# Allegro board GPS-NEO-M9N_25x25_V1_00.brd
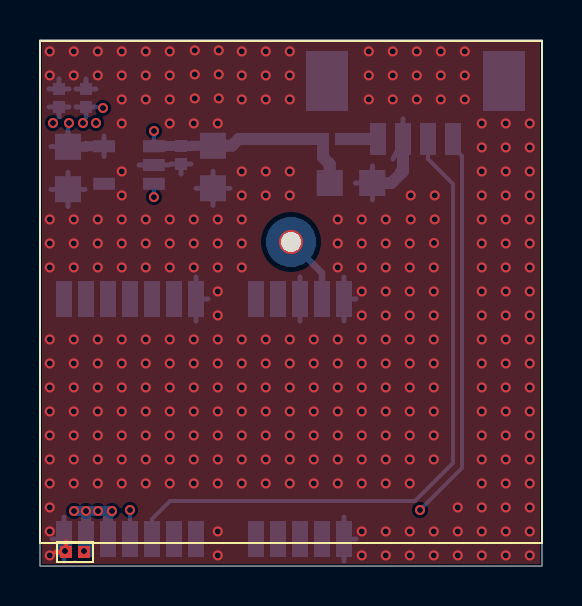
[diagram p0: board, top side]
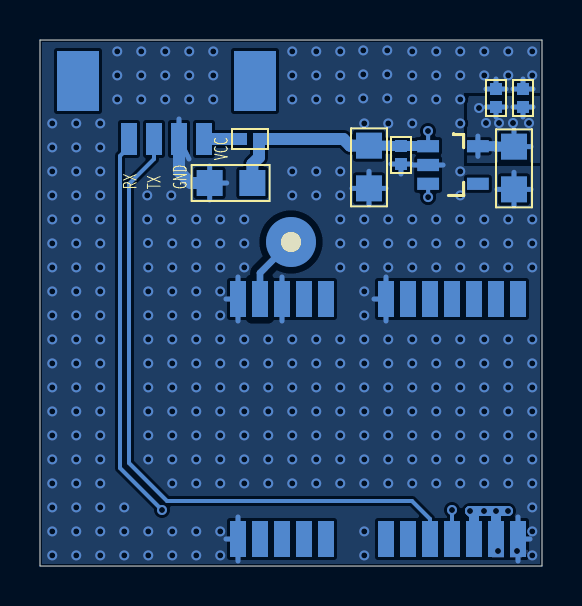
[diagram p1: board, bottom side, seen from below]

Outline 25.1 x 26.3 mm; copper layers: TOP, INNER_LAYER_2, INNER_LAYER_3, BOTTOM. Coordinates in mm from the lower left corner of the outline.
Outline path: 0,26.3 0,0 25.1,0 25.1,26.3 0,26.3

## Design rules (mm)
constraint set DEFAULT: min track width 0.15

## Placement (name value [footprint] x y rotation side)
C1  100uF/6V3  [R_0805]  8.65 19.95 90 bottom
C2  100nF  [R_0402]  7.05 20.55 90 bottom
C3  100uF/6V3  [R_0805]  1.4 19.9 90 bottom
C4  1uF  [R_0402]  1.75 0.7 0 top
C5  100nF  [R_0402]  0.95 23.4 270 bottom
C6  180pF  [R_0805]  15.55 19.15 180 bottom
C7  100nF  [R_0402]  2.3 23.4 270 bottom
J1  4x1_1.25mm Molex Picoblade  [R_CONN_MOLEX53261-4P-1_25H]  20.65 21.35 180 bottom
L1  6.8nH  [R_0402]  14.6 21.35 0 bottom
U1  UBLOX NEO-M9N  [R_UBLOX_NEO]  8.2 7.35 90 bottom
U2  APARM2504 25x25x4mm RHCP  [L_GPS_APARM2504_25X25X4]  12.55 13.7 180 top
U3  LDLN025M33R  [R_SOT23-5PIN]  4.45 20.05 270 bottom

## Library data of the parts
C1 C3 C6 = Cap 0402_2
C2 C4 C5 C7 = Cap 0402_0
J1 = CON3_30: room: COMPORT
L1 = FERRITE_chip_0: room: ATMEL
U1 = RJ11_32
U2 = RJ11_33
U3 = MIC4680_4: room: P25

## Footprints (pads in the part's own frame, mm; a bottom-side part is the same pattern mirrored in y, then rotated)
L_GPS_APARM2504_25X25X4
  round 1.2 hole 1: 1(0,-2.5)
R_0402
  rect 0.6x0.6 smd: 1(-0.45,0) 2(0.45,0)
R_0805
  rect 1.3x1.3 smd: 1(-1.067,0) 2(1.067,0)
R_CONN_MOLEX53261-4P-1_25H
  rect 0.8x1.6 smd: 1(0,0) 2(1.25,0) 3(2.5,0) 4(3.75,0)
  rect 2.1x3 smd: 5(-2.55,2.9) 6(6.3,2.9)
R_SOT23-5PIN
  rect 0.61x1.092 smd: 1(-0.94,-1.245) 2(0,-1.245) 3(0.94,-1.245) 4(0.94,1.245) 5(-0.94,1.245)
R_UBLOX_NEO
  rect 1.8x0.8 smd: 1(6,-7) 2(6,-5.9) 3(6,-4.8) 4(6,-3.7) 5(6,-2.6) 6(6,-1.5) 7(6,-0.4) 8(6,2.6) 9(6,3.7) 10(6,4.8) 11(6,5.9) 12(6,7) 13(-6,7) 14(-6,5.9) 15(-6,4.8) 16(-6,3.7) 17(-6,2.6) 18(-6,-0.4) 19(-6,-1.5) 20(-6,-2.6) 21(-6,-3.7) 22(-6,-4.8) 23(-6,-5.9) 24(-6,-7)

## Nets
+3.3V: C3.2 C4.2 C5.2 C7.2 U1.22 U1.23 U3.5(VOUT)
GND: C1.1 C2.1 C3.1 C4.1 C5.1 C6.1 C7.1 J1.3 U1.7(V_USB) U1.10 U1.12 U1.13 U1.24 U3.2
N17225410: U1.11 U2.1(ANT)
N17225550: J1.1 U1.21
N17225560: J1.2 U1.20
N17225572: C1.2 C2.2 C6.2 L1.1 U3.1 U3.3
N17229201: J1.4 L1.2

Pads without a net: J1 5 6; U1 1 2 3 4 5 6 8 9 14 15 16 17 18 19; U3 4

## Via types
v1: diameter 0.5, hole 0.3, TOP to BOTTOM, 317 vias

## Routing (per net, layer and track width the routed paths; a pad name or vN(x,y) marks a point on that pad's centre or on a via; arc(x,y) is an arc through that point)
+3.3V: length 12.3
  BOTTOM w0.25: C5.2 1.45,22.95 ; C5.2 0.95,22.45 ; C5.2 0.45,22.95 ; 1.8,22.95 C7.2 ; C7.2 2.3,22.45 ; C7.2 2.8,22.95 ; 3.21,21.5 U3.5 3.21,20.48 ; 1.4,21.82 C3.2 0.55,20.97
  BOTTOM w0.5: v1(2.3,2.75) v1(1.7,2.75) ; v1(2.3,2.75) v1(2.9,2.75) v1(3.6,2.75) 3.4,2.55 U1.22 ; v1(2.3,2.75) U1.23 ; C3.2 2.3,20.97 2.32,20.99 U3.5
  vias: v1(0.65,22.15) v1(1.45,22.15) v1(2.15,22.15) v1(2.2,0.75) v1(2.8,22.15) v1(3.15,22.9)
GND: length 35.4
  TOP w0.25: 1.3,1.2 C4.1 0.8,0.7
  TOP w0.3: v1(1.25,0.75) C4.1
  BOTTOM w0.25: C6.1 16.62,20 ; C6.1 15.77,19.15 ; C6.1 16.62,18.3 ; 6.55,20.1 C2.1 ; C2.1 7.05,19.6 ; C2.1 7.55,20.1 ; C1.1 8.65,19.73 ; C1.1 9.5,18.88 ; C1.1 8.65,18.03 ; C1.1 7.8,18.88 ; 0.6,1.35 U1.24 ; U1.24 1.2,2.45 ; U1.24 1.2,0.25 ; 18.15,22.35 J1.3 17.65,20.35 ; C5.1 1.45,23.85 ; C5.1 0.45,23.85 ; C5.1 0.95,24.35 ; 1.4,17.98 C3.1 ; C3.1 2.25,18.83 ; C3.1 0.55,18.83 ; C3.1 1.4,19.68 ; U1.13 15.8,1.35 ; U1.13 15.2,2.45 ; U1.13 15.2,0.25 ; C7.1 2.3,24.35 ; C7.1 2.8,23.85 ; C7.1 1.8,23.85 ; 6.44,20.05 U3.2 4.95,20.05 ; 7.8,12.25 U1.7 ; U1.7 8.4,13.35 ; U1.7 7.8,14.45 ; U1.12 15.8,13.35 ; U1.12 15.2,12.25 ; U1.12 15.2,14.45 ; 13,14.45 U1.10 13,12.25
  BOTTOM w0.6: C6.1 17.57,19.15 18.05,19.63 ; 18.05,19.63 18.15,19.73 J1.3 ; 18.05,19.63 18.05,19.7
  vias: v1(0.49,25.73) v1(0.49,24.53) v1(0.49,17.33) v1(0.49,16.13) v1(0.49,14.93) v1(0.49,11.33) v1(0.49,10.13) v1(0.49,8.93) v1(0.49,7.73) v1(0.49,6.53) v1(0.49,5.33) v1(0.49,4.13) v1(0.49,2.93) v1(0.49,1.73) v1(0.49,0.53) v1(1.69,25.73) v1(1.69,24.53) v1(1.69,17.33) v1(1.69,16.13) v1(1.69,14.93) v1(1.69,11.33) v1(1.69,10.13) v1(1.69,8.93) v1(1.69,7.73) v1(1.69,6.53) v1(1.69,5.33) v1(1.69,4.13) v1(2.89,25.73) v1(2.89,24.53) v1(2.89,17.33) v1(2.89,16.13) v1(2.89,14.93) v1(2.89,11.33) v1(2.89,10.13) v1(2.89,8.93) v1(2.89,7.73) v1(2.89,6.53) v1(2.89,5.33) v1(2.89,4.13) v1(4.09,25.73) v1(4.09,24.53) v1(4.09,23.33) v1(4.09,22.13) v1(4.09,19.73) v1(4.09,18.53) v1(4.09,17.33) v1(4.09,16.13) v1(4.09,14.93) v1(4.09,11.33) v1(4.09,10.13) v1(4.09,8.93) v1(4.09,7.73) v1(4.09,6.53) v1(4.09,5.33) v1(4.09,4.13) v1(5.29,25.73) v1(5.29,24.53) v1(5.29,23.33) v1(5.29,17.33) v1(5.29,16.13) v1(5.29,14.93) v1(5.29,11.33) v1(5.29,10.13) v1(5.29,8.93) v1(5.29,7.73) v1(5.29,6.53) v1(5.29,5.33) v1(5.29,4.13) v1(6.49,25.73) v1(6.49,24.53) v1(6.49,23.33) v1(6.49,22.13) v1(6.49,17.33) v1(6.49,16.13) v1(6.49,14.93) v1(6.49,11.33) v1(6.49,10.13) v1(6.49,8.93) v1(6.49,7.73) v1(6.49,6.53) v1(6.49,5.33) v1(6.49,4.13) v1(7.74,25.78) v1(7.74,24.58) v1(7.74,23.38) v1(7.69,22.13) v1(7.69,17.33) v1(7.69,16.13) v1(7.69,14.93) v1(7.69,11.33) v1(7.69,10.13) v1(7.69,8.93) v1(7.69,7.73) v1(7.69,6.53) v1(7.69,5.33) v1(7.69,4.13) v1(8.94,25.78) v1(8.94,24.58) v1(8.94,23.38) v1(8.89,22.13) v1(8.89,17.33) v1(8.89,16.13) v1(8.89,14.93) v1(8.89,13.73) v1(8.89,12.53) v1(8.89,11.33) v1(8.89,10.13) v1(8.89,8.93) v1(8.89,7.73) v1(8.89,6.53) v1(8.89,5.33) v1(8.89,4.13) v1(8.89,1.73) v1(8.89,0.53) v1(10.09,25.73) v1(10.09,24.53) v1(10.09,23.33) v1(10.09,19.73) v1(10.09,18.53) v1(10.09,17.33) v1(10.09,16.13) v1(10.09,14.93) v1(10.09,11.33) v1(10.09,10.13) v1(10.09,8.93) v1(10.09,7.73) v1(10.09,6.53) v1(10.09,5.33) v1(10.09,4.13) v1(11.29,25.73) v1(11.29,24.53) v1(11.29,23.33) v1(11.29,19.73) v1(11.29,18.53) v1(11.29,11.33) v1(11.29,10.13) v1(11.29,8.93) v1(11.29,7.73) v1(11.29,6.53) v1(11.29,5.33) v1(11.29,4.13) v1(12.49,25.73) v1(12.49,24.53) v1(12.49,23.33) v1(12.49,19.73) v1(12.49,18.53) v1(12.49,11.33) v1(12.49,10.13) v1(12.49,8.93) v1(12.49,7.73) v1(12.49,6.53) v1(12.49,5.33) v1(12.49,4.13) v1(13.69,11.33) v1(13.69,10.13) v1(13.69,8.93) v1(13.69,7.73) v1(13.69,6.53) v1(13.69,5.33) v1(13.69,4.13) v1(14.89,17.33) v1(14.89,16.13) v1(14.89,14.93) v1(14.89,11.33) v1(14.89,10.13) v1(14.89,8.93) v1(14.89,7.73) v1(14.89,6.53) v1(14.89,5.33) v1(14.89,4.13) v1(16.09,17.33) v1(16.09,16.13) v1(16.09,14.93) v1(16.09,13.73) v1(16.09,12.53) v1(16.09,11.33) v1(16.09,10.13) v1(16.09,8.93) v1(16.09,7.73) v1(16.09,6.53) v1(16.09,5.33) v1(16.09,4.13) v1(16.09,1.73) v1(16.09,0.53) v1(16.44,25.73) v1(16.44,24.53) v1(16.44,23.33) v1(17.29,17.33) v1(17.29,16.13) v1(17.29,14.93) v1(17.29,13.73) v1(17.29,12.53) v1(17.29,11.33) v1(17.29,10.13) v1(17.29,8.93) v1(17.29,7.73) v1(17.29,6.53) v1(17.29,5.33) v1(17.29,4.13) v1(17.29,1.73) v1(17.29,0.53) v1(17.64,25.73) v1(17.64,24.53) v1(17.64,23.33) v1(18.54,18.53) v1(18.54,17.33) v1(18.49,16.13) v1(18.49,14.93) v1(18.49,13.73) v1(18.49,12.53) v1(18.49,11.33) v1(18.49,10.13) v1(18.49,8.93) v1(18.49,7.73) v1(18.49,6.53) v1(18.49,5.33) v1(18.49,4.13) v1(18.49,1.73) v1(18.49,0.53) v1(18.84,25.73) v1(18.84,24.53) v1(18.84,23.33) v1(19.74,18.53) v1(19.74,17.33) v1(19.7,16.15) v1(19.69,14.93) v1(19.69,13.73) v1(19.69,12.53) v1(19.69,11.33) v1(19.69,10.13) v1(19.69,8.93) v1(19.69,7.73) v1(19.69,6.53) v1(19.69,5.33) v1(19.69,1.73) v1(19.69,0.53) v1(20.04,25.73) v1(20.04,24.53) v1(20.04,23.33) v1(20.89,2.93) v1(20.89,1.73) v1(20.89,0.53) v1(21.24,25.73) v1(21.24,24.53) v1(21.24,23.33) v1(22.09,22.13) v1(22.09,20.93) v1(22.09,19.73) v1(22.09,18.53) v1(22.09,17.33) v1(22.09,16.13) v1(22.09,14.93) v1(22.09,13.73) v1(22.09,12.53) v1(22.09,11.33) v1(22.09,10.13) v1(22.09,8.93) v1(22.09,7.73) v1(22.09,6.53) v1(22.09,5.33) v1(22.09,4.13) v1(22.09,2.93) v1(22.09,1.73) v1(22.09,0.53) v1(23.29,22.13) v1(23.29,20.93) v1(23.29,19.73) v1(23.29,18.53) v1(23.29,17.33) v1(23.29,16.13) v1(23.29,14.93) v1(23.29,13.73) v1(23.29,12.53) v1(23.29,11.33) v1(23.29,10.13) v1(23.29,8.93) v1(23.29,7.73) v1(23.29,6.53) v1(23.29,5.33) v1(23.29,4.13) v1(23.29,2.93) v1(23.29,1.73) v1(23.29,0.53) v1(24.49,22.13) v1(24.49,20.93) v1(24.49,19.73) v1(24.49,18.53) v1(24.49,17.33) v1(24.49,16.13) v1(24.49,14.93) v1(24.49,13.73) v1(24.49,12.53) v1(24.49,11.33) v1(24.49,10.13) v1(24.49,8.93) v1(24.49,7.73) v1(24.49,6.53) v1(24.49,5.33) v1(24.49,4.13) v1(24.49,2.93) v1(24.49,1.73) v1(24.49,0.53)
N17225410: length 3.5
  BOTTOM w0.33: U2.1 14.1,14.65 U1.11
N17225550: length 35.6
  INNER_LAYER_2 w0.2: v1(19,2.8) v1(4.5,2.8)
  BOTTOM w0.2: U1.21 v1(4.5,2.8) ; J1.1 20.65,20.95 21.1,20.5 21.1,4.9 v1(19,2.8)
N17225560: length 33.9
  BOTTOM w0.2: U1.20 5.6,2.35 6.5,3.25 18.75,3.25 20.65,5.15 20.65,19.1 19.4,20.35 J1.2
N17225572: length 15.7
  INNER_LAYER_2 w0.2: v1(5.69,18.44) 5.69,21.39 5.7,21.4 v1(5.7,21.75)
  BOTTOM w0.2: U3.1 5.69,21.64 5.7,21.65 v1(5.7,21.75) ; U3.3 v1(5.69,18.44)
  BOTTOM w0.5: U3.1 5.7,21 C2.2 7.6,21 7.62,21.02 C1.2
  BOTTOM w0.6: C6.2 14.48,20.1 14.15,20.43 L1.1 9.93,21.35 9.6,21.02 C1.2
N17229201: length 1.8
  BOTTOM w0.6: J1.4 L1.2

## Copper pours and planes (outline as drawn; the poured copper is in the pictures)
+3.3V on BOTTOM: 3.75,20.15 3.75,23.5 0.1,23.5 0.1,20.15
+3.3V on INNER_LAYER_2: 0.1,26.2 25,26.2 25,0.1 0.1,0.1
GND on TOP: -0.5,26.8 -0.5,-0.65 25.75,-0.65 25.75,26.8
GND on BOTTOM, INNER_LAYER_3: 0.1,26.2 25,26.2 25,0.1 0.1,0.1

## Text on the board
Ref Des/Silkscreen Bottom: VCC | GND | TX | RX
NS_TOC: PAGE | 2 | 3 | 4 | 5 | 6 | CONTENT | 1_TOP | 2_INNER_LAYER_2 | 3_INNER_LAYER_3 | 4_BOTTOM | Silkscreen_top
User.12: FIGURE | FINISHED_SIZE | 0.3 | 1.0 | DRILL CHART: TOP to BOTTOM | ALL UNITS ARE IN MILLIMETERS | TOLERANCE_DRILL | +0.05/-0.05 | +0.2/-0.2 | PLATED | QTY | 317 | 1
